# Altium PCB asinc_counter.PcbDoc
Units mm, origin at the board's own origin, x right, y up, seen from the top; angles counter-clockwise.
Board outline 50.13 x 42.04 mm, 2 copper layers (Top Layer, Bottom Layer); 7 components, 11 nets, 60 pads, 20 vias.
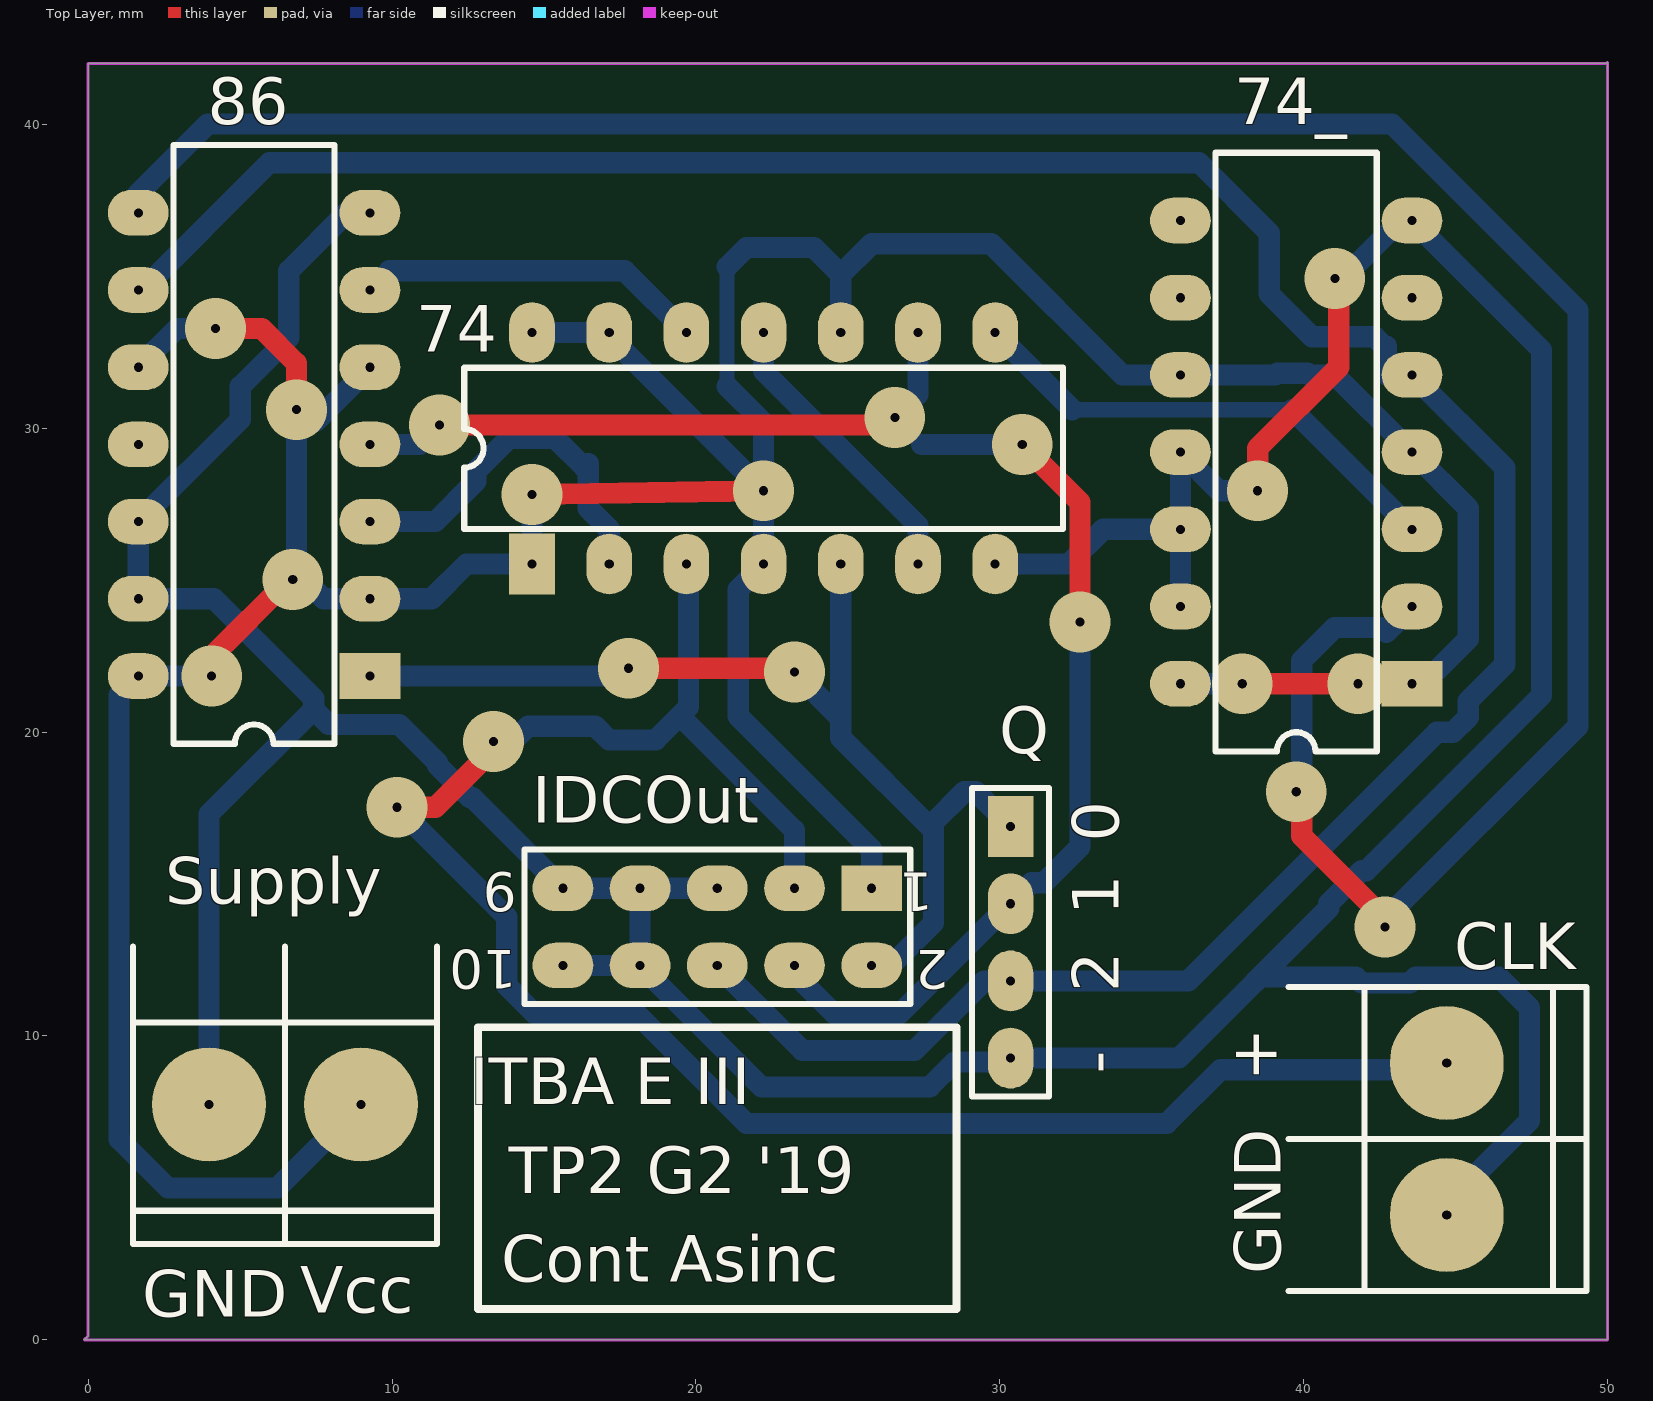
[diagram p0: Top Layer view]
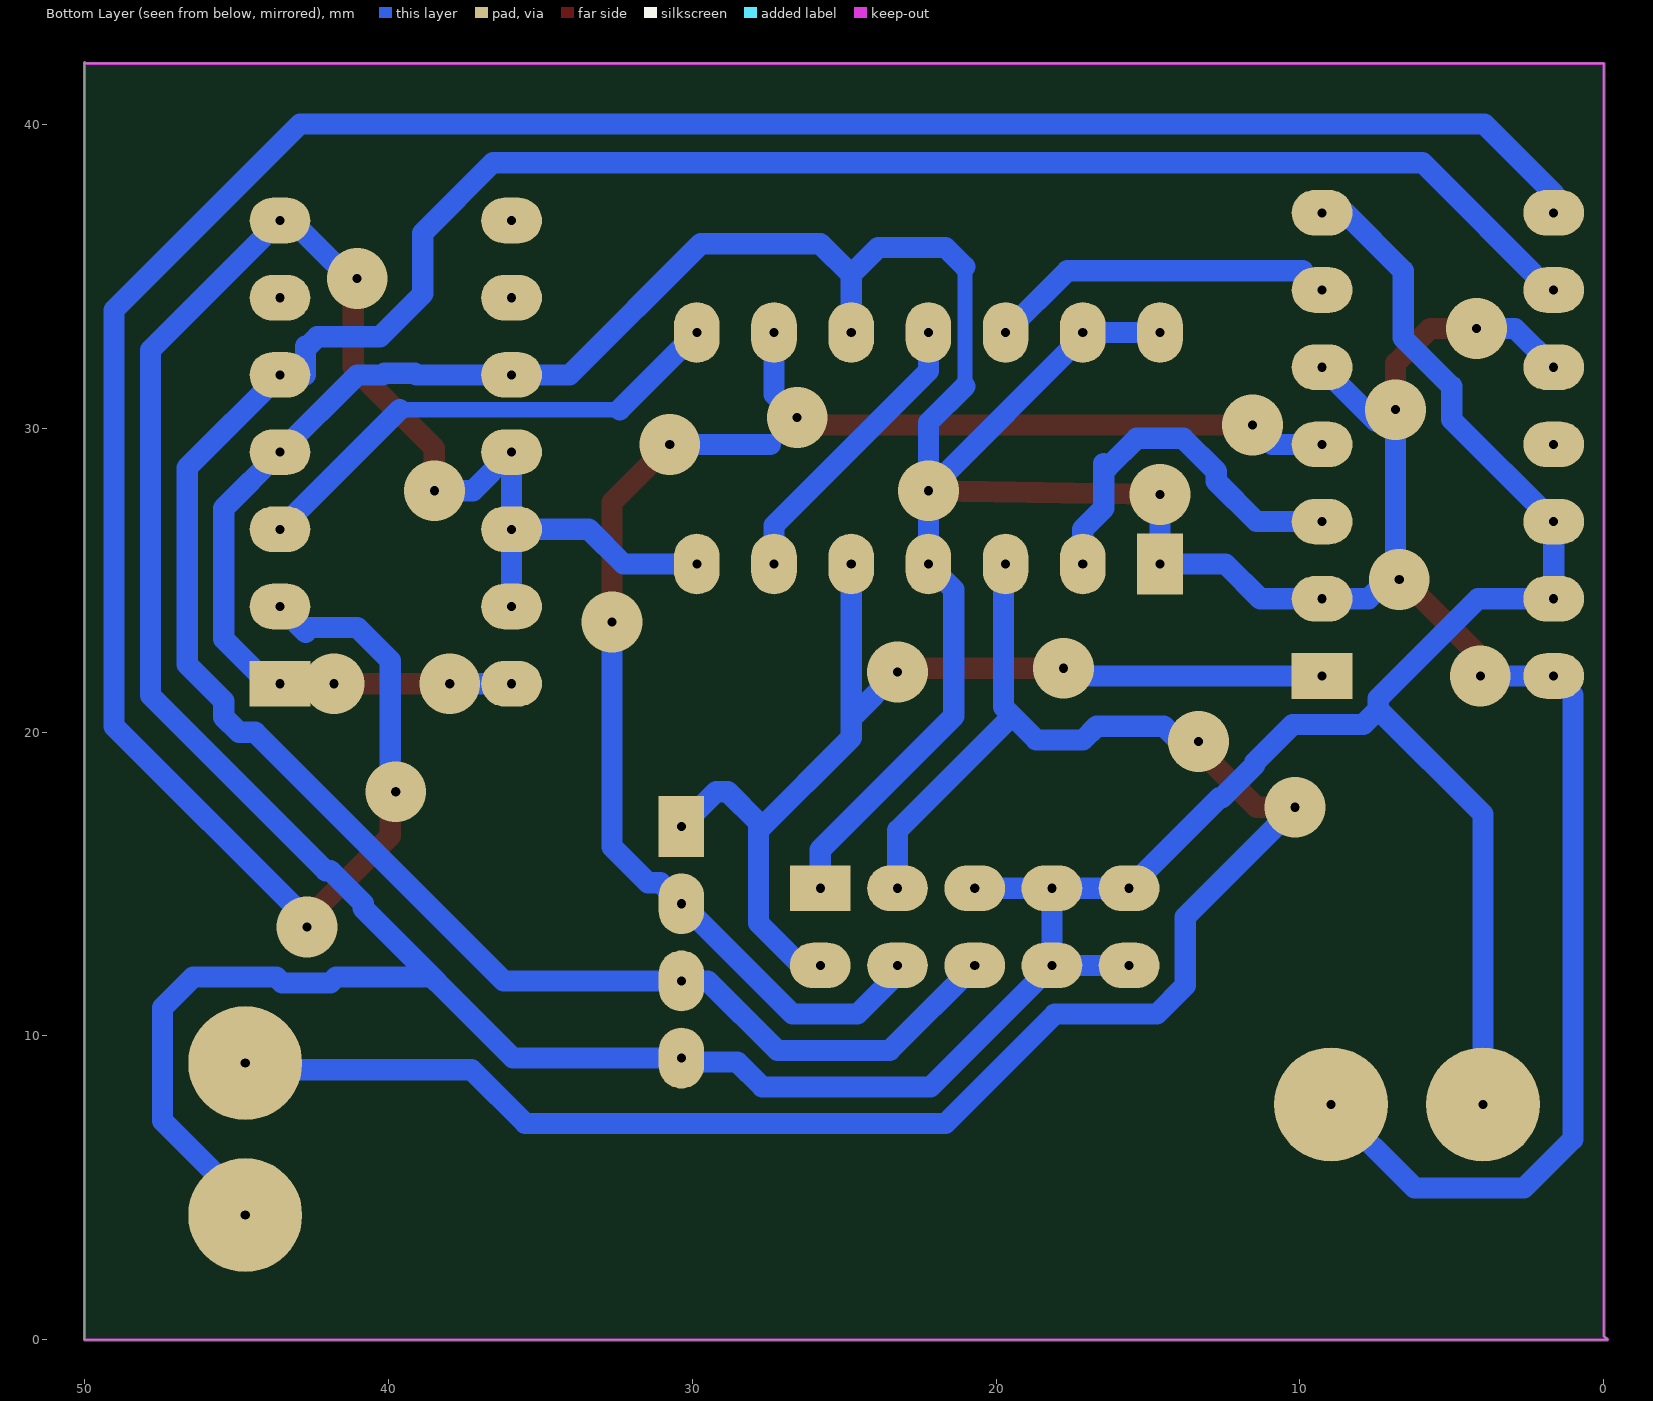
[diagram p1: Bottom Layer view, seen from below]

## Layer stack, top to bottom
Top Solder: solder mask 0.0102, Solder Resist, Dk 3.5
Top Layer: signal copper 0.0356
Dielectric 1: dielectric 0.32, FR-4, Dk 4.8
Bottom Layer: signal copper 0.0356
Bottom Solder: solder mask 0.0102, Solder Resist, Dk 3.5

## Board outline
-0.127,0 0,0.127 0,42 49.963,42 50,42.037 50,0

## Design rules (kind name [scope] priority, off if disabled: settings)
Clearance [All] p1: gap=0.5
PolygonConnect [All] p1: connectstyle=Relief reliefconductorwidth=0.254 reliefentries=4 polygonreliefangle="90 Angle" airgapwidth=0.254
RoutingVias [All] p1: holewidth=0.3 width=2 viastyle="Through Hole" minholewidth=0.3 minwidth=2 maxholewidth=0.3 maxwidth=2
SolderMaskExpansion [All] p1: expansion=0.102
Width [All] p1: maxlimit=0.7 minlimit=0.7 preferedwidth=0.7
30 further rules are at their usual default settings.

## Components (designator, comment, footprint, x,y, rotation, side; value= is the part's Value field where it differs from the comment)
74 "SN74LS74AN" N014D 22.225,29.337 r0 top
74_ "SN74LS74AN" N014D 39.751,29.21 r90 top
86 "SN74ALS86N" N014 5.461,29.464 r90 top
CLK "BORNERA 2" BORNERA2 44.704,6.604 r180 top
IDCOut "Header 5X2" HDR2X5 25.781,14.859 r180 top
Q "Header 4" HDR1X4 30.353,16.891 r270 top
Supply "BORNERA 2" BORNERA2 6.477,7.747 r90 top

## Footprints (in the part's own frame and the unit in brackets; to place one, negate y for a bottom-side part, rotate by r counter-clockwise, add the part's x,y. Pads: shape width x height; smd on the part's side, far side on the other; paste and mask are expansions set on the pad)
BORNERA2 [mm] "Bornera con Tornillos 5mm separación"
  round 3.75 hole 0.3: 1(0,2.5) 2(0,-2.5)
  silkscreen extent -4.6,-5 5.2,5, body extent -3.76,-4.89 3.94,5.61, height 10
HDR1X4 [mm] "Connector; Header; 4 Position"
  rect 2x1.5 hole 0.3: 1(0,0)
  oval 2x1.5 hole 0.3: 2(2.54,0) 3(5.08,0) 4(7.62,0)
  silkscreen extent -1.27,-1.27 8.89,1.27
HDR2X5 [mm] "Connector; Header; 5x2 Position"
  rect 2x1.5 hole 0.3: 1(0,0)
  oval 2x1.5 hole 0.3: 2(0,2.54) 3(2.54,0) 4(2.54,2.54) 5(5.08,0) 6(5.08,2.54) 7(7.62,0) 8(7.62,2.54) 9(10.16,0) 10(10.16,2.54)
  silkscreen extent -1.27,-1.27 11.43,3.81
N014 [mm] "DIP; 14 Leads; Row Spacing 7.62 mm; Pitch 2.54 mm"
  rect 1.5x2 hole 0.3: 1(-7.62,-3.81)
  oval 1.5x2 hole 0.3: 2(-5.08,-3.81) 3(-2.54,-3.81) 4(0,-3.81) 5(2.54,-3.81) 6(5.08,-3.81) 7(7.62,-3.81) 8(7.62,3.81) 9(5.08,3.81) 10(2.54,3.81) 11(0,3.81) 12(-2.54,3.81) 13(-5.08,3.81) 14(-7.62,3.81)
  silkscreen extent -9.85,-2.65 9.85,2.65
N014D [mm] "DIP; 14 Leads; Row Spacing 7.62 mm; Pitch 2.54 mm"
  rect 1.5x2 hole 0.3: 1(-7.62,-3.81)
  oval 1.5x2 hole 0.3: 2(-5.08,-3.81) 3(-2.54,-3.81) 4(0,-3.81) 5(2.54,-3.81) 6(5.08,-3.81) 7(7.62,-3.81) 8(7.62,3.81) 9(5.08,3.81) 10(2.54,3.81) 11(0,3.81) 12(-2.54,3.81) 13(-5.08,3.81) 14(-7.62,3.81)
  silkscreen extent -9.85,-2.65 9.85,2.65

## Part data
74 74_: "Dual D-Type Positive-Edge-Triggered Flip-Flop with Preset and Clear"
86: "Quadruple 2-Input Exclusive-OR Gate"
IDCOut: "Header, 5-Pin, Dual row"
Q: "Header, 4-Pin"

## Via types
v1: diameter 2, hole 0.3, Top Layer to Bottom Layer, 20 vias

## Nets (pads, with @x,y where several pads share a name; then routed paths per layer and width w, separated by ;. In a path a pad name is that pad's centre, name@x,y a point inside that pad or via, vN(x,y) a via of type N, cw(c..) or ccw(c..) an arc to the next point about the centre after c; other vN are vias at no path point)
CLK: 74.3 CLK.2 IDCOut.3 | length 65.3
  Top Layer w0.7: v1(10.16,17.526) 11.43,17.526 13.652,19.748 13.716,19.685 v1(13.335,19.685)
  Bottom Layer w0.7: v1(10.16,17.526) 13.771,13.915 13.771,11.656 14.708,10.719 18.064,10.719 21.664,7.119 35.486,7.119 37.257,8.89 44.109,8.89 CLK.2@44.704,9.485 ; v1(13.335,19.685) 13.462,19.685 13.716,19.431 14.478,20.193 16.688,20.193 17.141,19.74 18.673,19.74 19.757,20.824 19.757,25.455 74.3 ; 19.621,20.383 23.241,16.764 IDCOut.3
GND: 74.7 74_.7 74_.11 74_.12 74_.13 86.7 86.12 86.13 CLK.1 IDCOut.5 IDCOut.7 IDCOut.8 IDCOut.9 IDCOut.10 Q.4 Supply.1 | length 155.4
  Top Layer w0.7: v1(38.481,27.94) 38.481,29.337 41.148,32.004 41.148,34.798 v1(41.021,34.925)
  Bottom Layer w0.7: Supply.1 3.977,17.298 7.421,20.742 ; 86.7@8.509,37.084 6.604,35.179 6.604,32.969 5.008,31.373 5.008,30.281 86.12 86.13 4.14,24.384 7.421,21.103 7.421,20.742 ; 11.485,18.919 12.569,17.835 ; 11.485,18.995 10.236,20.244 7.919,20.244 7.421,20.742 ; 12.645,17.835 IDCOut.9 IDCOut.7 ; IDCOut.10 IDCOut.8 ; IDCOut.5 IDCOut.7 ; 74.7 32.258,25.527 33.401,26.67 74_.12 ; Q.4@30.353,9.144 28.513,9.144 27.688,8.319 22.161,8.319 IDCOut.8 ; Q.4 35.891,9.271 40.822,14.202 40.822,14.355 41.906,15.439 42.059,15.439 47.822,21.202 47.822,32.569 74_.7 43.18,36.83 41.275,34.925 v1(41.021,34.925) ; 74_.13 74_.12 ; v1(38.481,27.94) 37.211,27.94 74_.11 74_.12 ; 38.608,11.938 41.707,11.938 41.906,11.739 43.485,11.739 43.684,11.938 46.417,11.938 47.429,10.926 47.429,7.21 CLK.1@44.704,4.485 ; IDCOut.8 IDCOut.7
Net74_2: 74.2 86.3 | length 12.6
  Bottom Layer w0.7: 86.3 11.43,26.924 12.755,28.249 12.755,28.579 13.839,29.663 15.371,29.663 16.328,28.706 16.455,28.833 16.455,27.36 17.145,26.67 74.2
Net74_6: 74.6 74.11 | length 9.7
  Bottom Layer w0.7: 74.11 22.225,31.877 27.305,26.797 74.6
Net74_8: 74.8 74_.3 | length 16.4
  Bottom Layer w0.5: 32.385,30.607 39.624,30.607
  Bottom Layer w0.7: 74.8 32.385,30.607 ; 39.624,30.607 74_.3
Net74_12: 74.12 86.6 | length 10.6
  Bottom Layer w0.7: 86.6@9.906,35.179 17.653,35.179 74.12
Net74__2: 74_.2 86.8 | length 89.9
  Top Layer w0.7: v1(39.751,18.034) 39.243,18.034 39.933,17.344 39.933,16.582 42.672,13.843 v1(42.672,13.589)
  Bottom Layer w0.7: 86.8@1.651,37.719 3.937,40.005 42.899,40.005 49.022,33.882 49.022,20.193 v1@42.672,13.843 ; v1@39.933,17.78 39.933,22.356 41.017,23.44 42.71,23.44 42.71,23.279 74_.2 ; v1@42.418,14.097 v1@42.672,13.843 ; v1@42.545,13.97 v1@42.672,13.843 ; v1(42.672,13.589) v1@42.672,13.843
Q0: 74.5 86.1 IDCOut.2 Q.1 | length 35.7
  Top Layer w0.7: v1(17.78,22.098) 23.114,22.098 v1(23.241,21.971)
  Bottom Layer w0.7: 86.1 17.526,21.844 v1(17.78,22.098) ; v1(23.241,21.971) 24.765,20.447 ; 74.5 24.765,20.447 ; IDCOut.2 26.416,12.319 27.813,13.716 27.813,16.764 ; Q.1 29.21,18.034 28.829,18.034 27.813,17.018 27.813,16.764 ; 24.765,20.447 24.765,19.812 27.813,16.764
Q1: 74.9 86.4 IDCOut.4 Q.2 | length 49.3
  Top Layer w0.7: v1(11.557,30.099) 26.289,30.099 v1(26.543,30.353) ; v1(30.734,29.464) 32.639,27.559 v1(32.639,23.622)
  Bottom Layer w0.7: 86.4 v1@10.922,29.464 ; IDCOut.4@23.241,12.04 24.562,10.719 26.694,10.719 Q.2@30.022,14.047 ; v1(26.543,30.353) 27.305,31.115 74.9 ; 27.432,29.464 v1(30.734,29.464) ; Q.2 31.043,15.041 31.455,15.041 32.639,16.225 v1(32.639,23.622) v1@32.385,23.876
Q2: 74_.5 86.9 IDCOut.6 Q.3 | length 91.7
  Bottom Layer w0.7: 86.9@1.714,34.48 5.969,38.735 36.549,38.735 38.862,36.422 38.862,34.417 40.272,33.007 42.331,33.007 42.648,32.69 42.718,32.69 42.718,31.75 74_.5 46.611,28.7 46.611,25.51 46.609,25.508 46.609,25.292 46.611,25.29 46.611,22.222 45.411,21.022 45.411,20.488 44.913,19.99 44.379,19.99 36.2,11.811 Q.3 29.483,11.811 27.191,9.519 23.501,9.519 IDCOut.6
VCC: 74.1 74.4 74.10 74.13 74.14 74_.1 74_.4 74_.10 74_.14 86.2 86.5 86.10 86.14 IDCOut.1 Supply.2 | length 144.3
  Top Layer w0.7: v1(4.064,21.844) 4.064,22.479 6.604,25.019 v1(6.731,25.019) ; v1(4.191,33.274) 5.715,33.274 6.858,32.131 v1(6.858,30.607) ; v1(14.605,27.813) v1(22.225,27.94) ; v1(37.973,21.59) v1(41.783,21.59)
  Bottom Layer w0.5: 21.025,31.38 21.025,35.306
  Bottom Layer w0.7: 86.14@1.016,21.209 1.016,6.604 2.627,4.993 6.223,4.993 Supply.2 ; 86.14 v1(4.064,21.844) ; 86.10 2.921,33.274 v1(4.191,33.274) ; v1@6.858,25.273 v1(6.858,30.607) 7.112,30.607 7.493,30.226 86.5 ; v1@6.921,25.209 7.747,24.384 86.2 11.303,24.384 12.446,25.527 74.1 14.605,27.432 v1@14.986,27.813 ; 74.14 17.018,33.147 v1(22.225,27.94) ; 21.025,31.38 22.225,30.18 v1(22.225,27.94) ; 21.025,35.306 21.66,35.941 23.876,35.941 24.765,35.052 ; 74.10 24.765,35.052 ; IDCOut.1 25.781,16.129 21.391,20.519 21.391,24.693 74.4 v1(22.225,27.94) ; 74_.14 v1(37.973,21.59) ; v1(41.783,21.59) 74_.1 43.942,21.59 45.411,23.059 45.411,24.793 45.409,24.795 45.409,26.005 45.411,26.007 45.411,27.36 74_.4 41.021,31.75 40.178,31.75 40.121,31.807 39.127,31.807 39.07,31.75 74_.10 34.036,31.75 29.718,36.068 25.781,36.068 24.765,35.052
pads on no net: 74_.6 74_.8 74_.9 86.11

## Keep-outs
Keep-Out Layer:
  the board outline again, w0.1

## Silkscreen, mask and mechanical layers (free items; w line width, h text height)
Top Overlay:
  lines w0.254: 12.827,1.016 12.827,1.143 12.827,10.287 28.575,10.287 28.575,1.016 12.827,1.016
  text "0" at 33.909,16.383 h1.52 r90
  text "1" at 33.909,13.97 h1.52 r90
  text "2" at 33.909,11.43 h1.52 r90
  text "-" at 33.909,8.763 h1.52 r90
  text "+" at 39.116,8.509 h1.52 r90
  text "ITBA E III" at 12.573,7.747 h1.52
  text "TP2 G2 '19" at 13.843,4.826 h1.52
  text "GND" at 39.243,2.159 h1.52 r90
  text "Cont Asinc" at 13.589,1.905 h1.52
  text "Vcc" at 6.985,0.889 h1.52
  text "GND" at 1.778,0.762 h1.52

## Text inside footprints (layer, text, board x,y; h text height)
IDCOut: Top Overlay "2" at 28.321,12.827 h1.27 r180; Top Overlay "1" at 27.813,15.367 h1.27 r180; Top Overlay "9" at 14.097,15.367 h1.27 r180; Top Overlay "10" at 14.097,12.827 h1.27 r180